# Altium PCB PCB1.1.PcbDoc
Units mm, origin at the board's own origin, x right, y up, seen from the top; angles counter-clockwise.
Board outline 96.29 x 83.36 mm, 2 copper layers (Top Layer, Bottom Layer); 54 components, 58 nets, 305 pads, 6 vias.
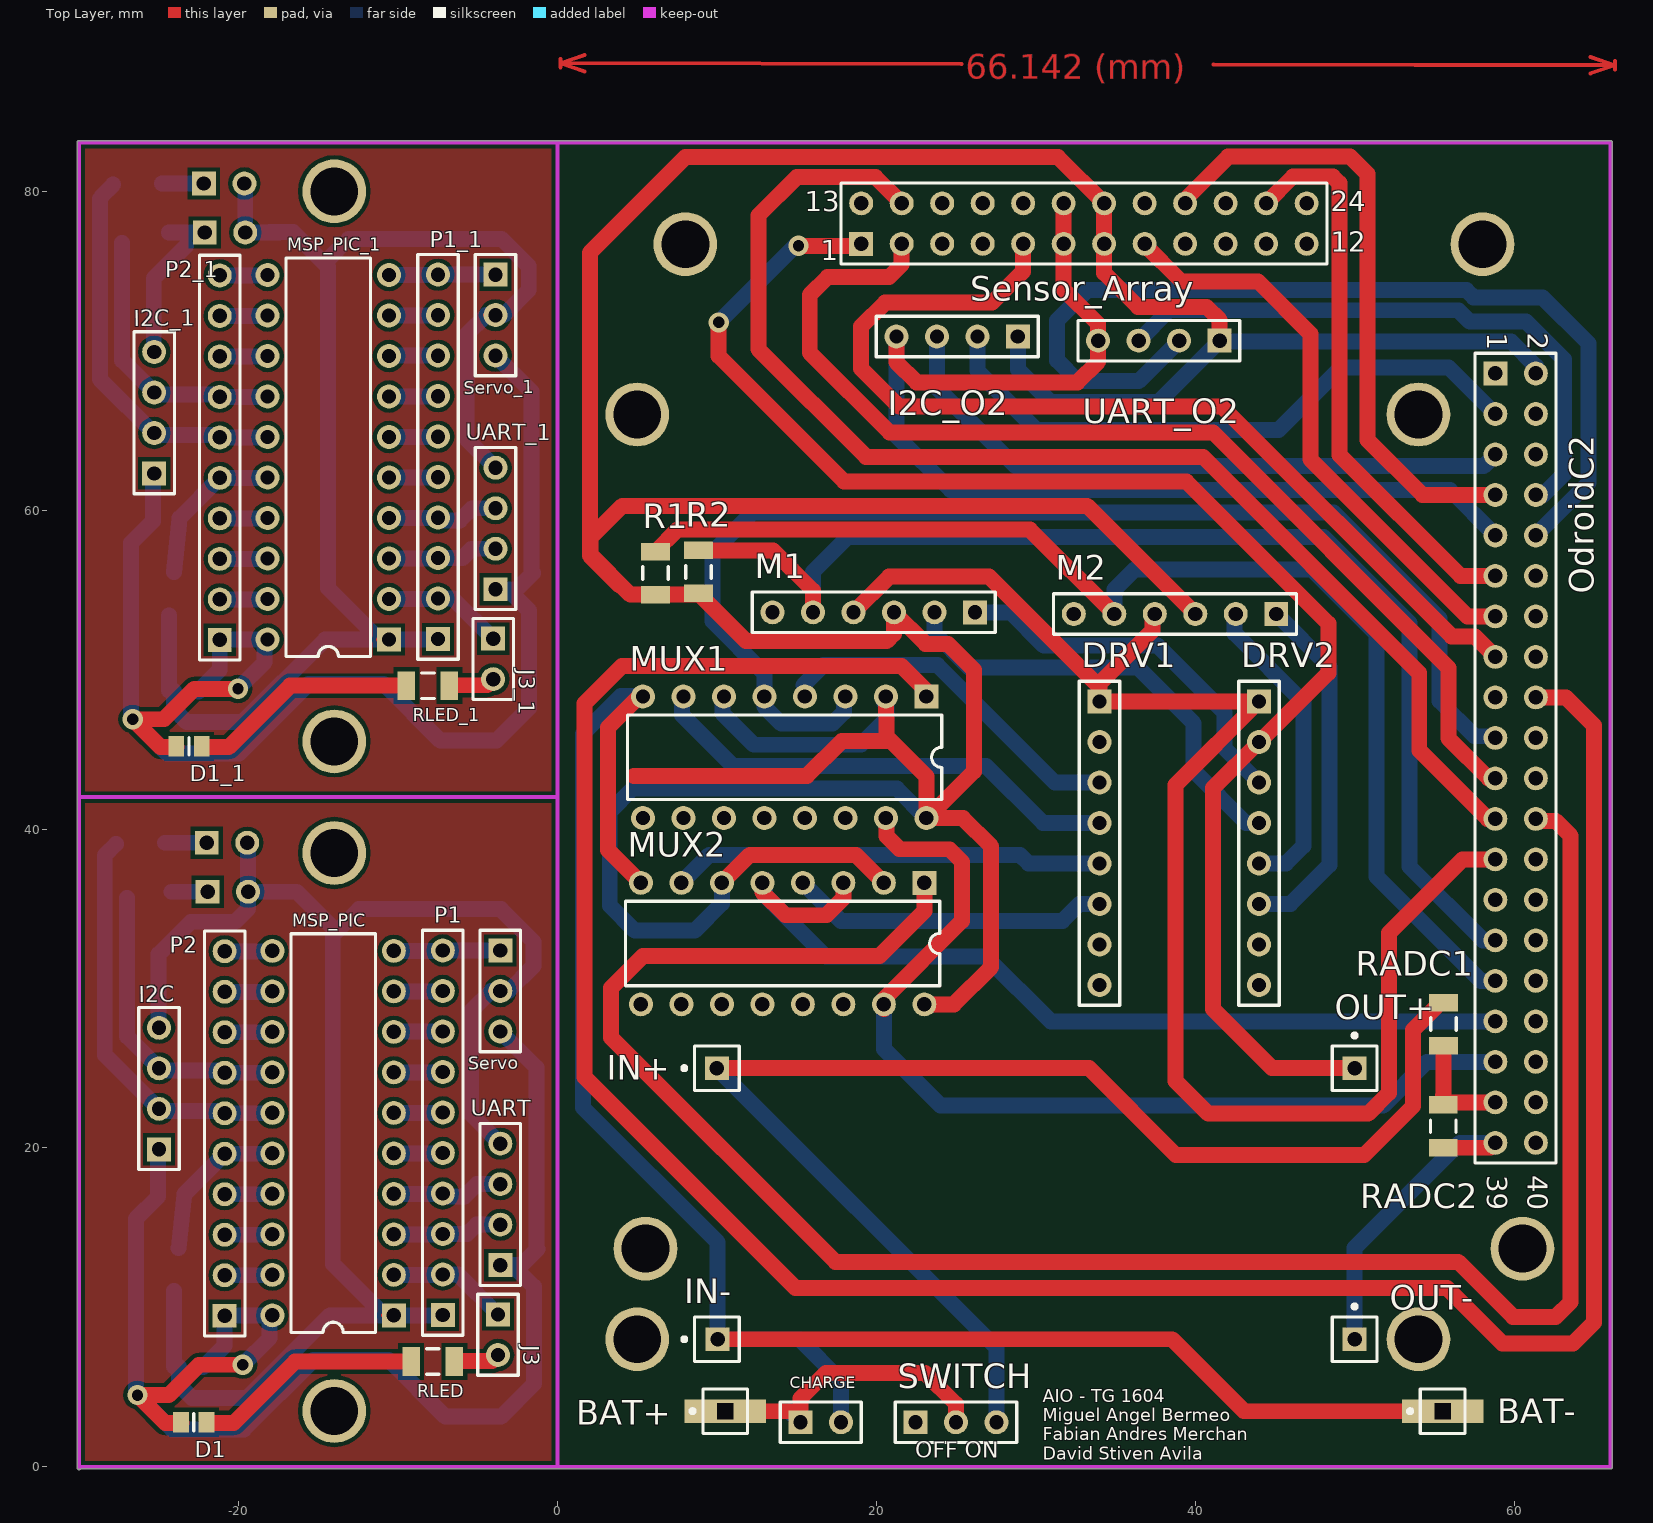
[diagram p0: Top Layer view]
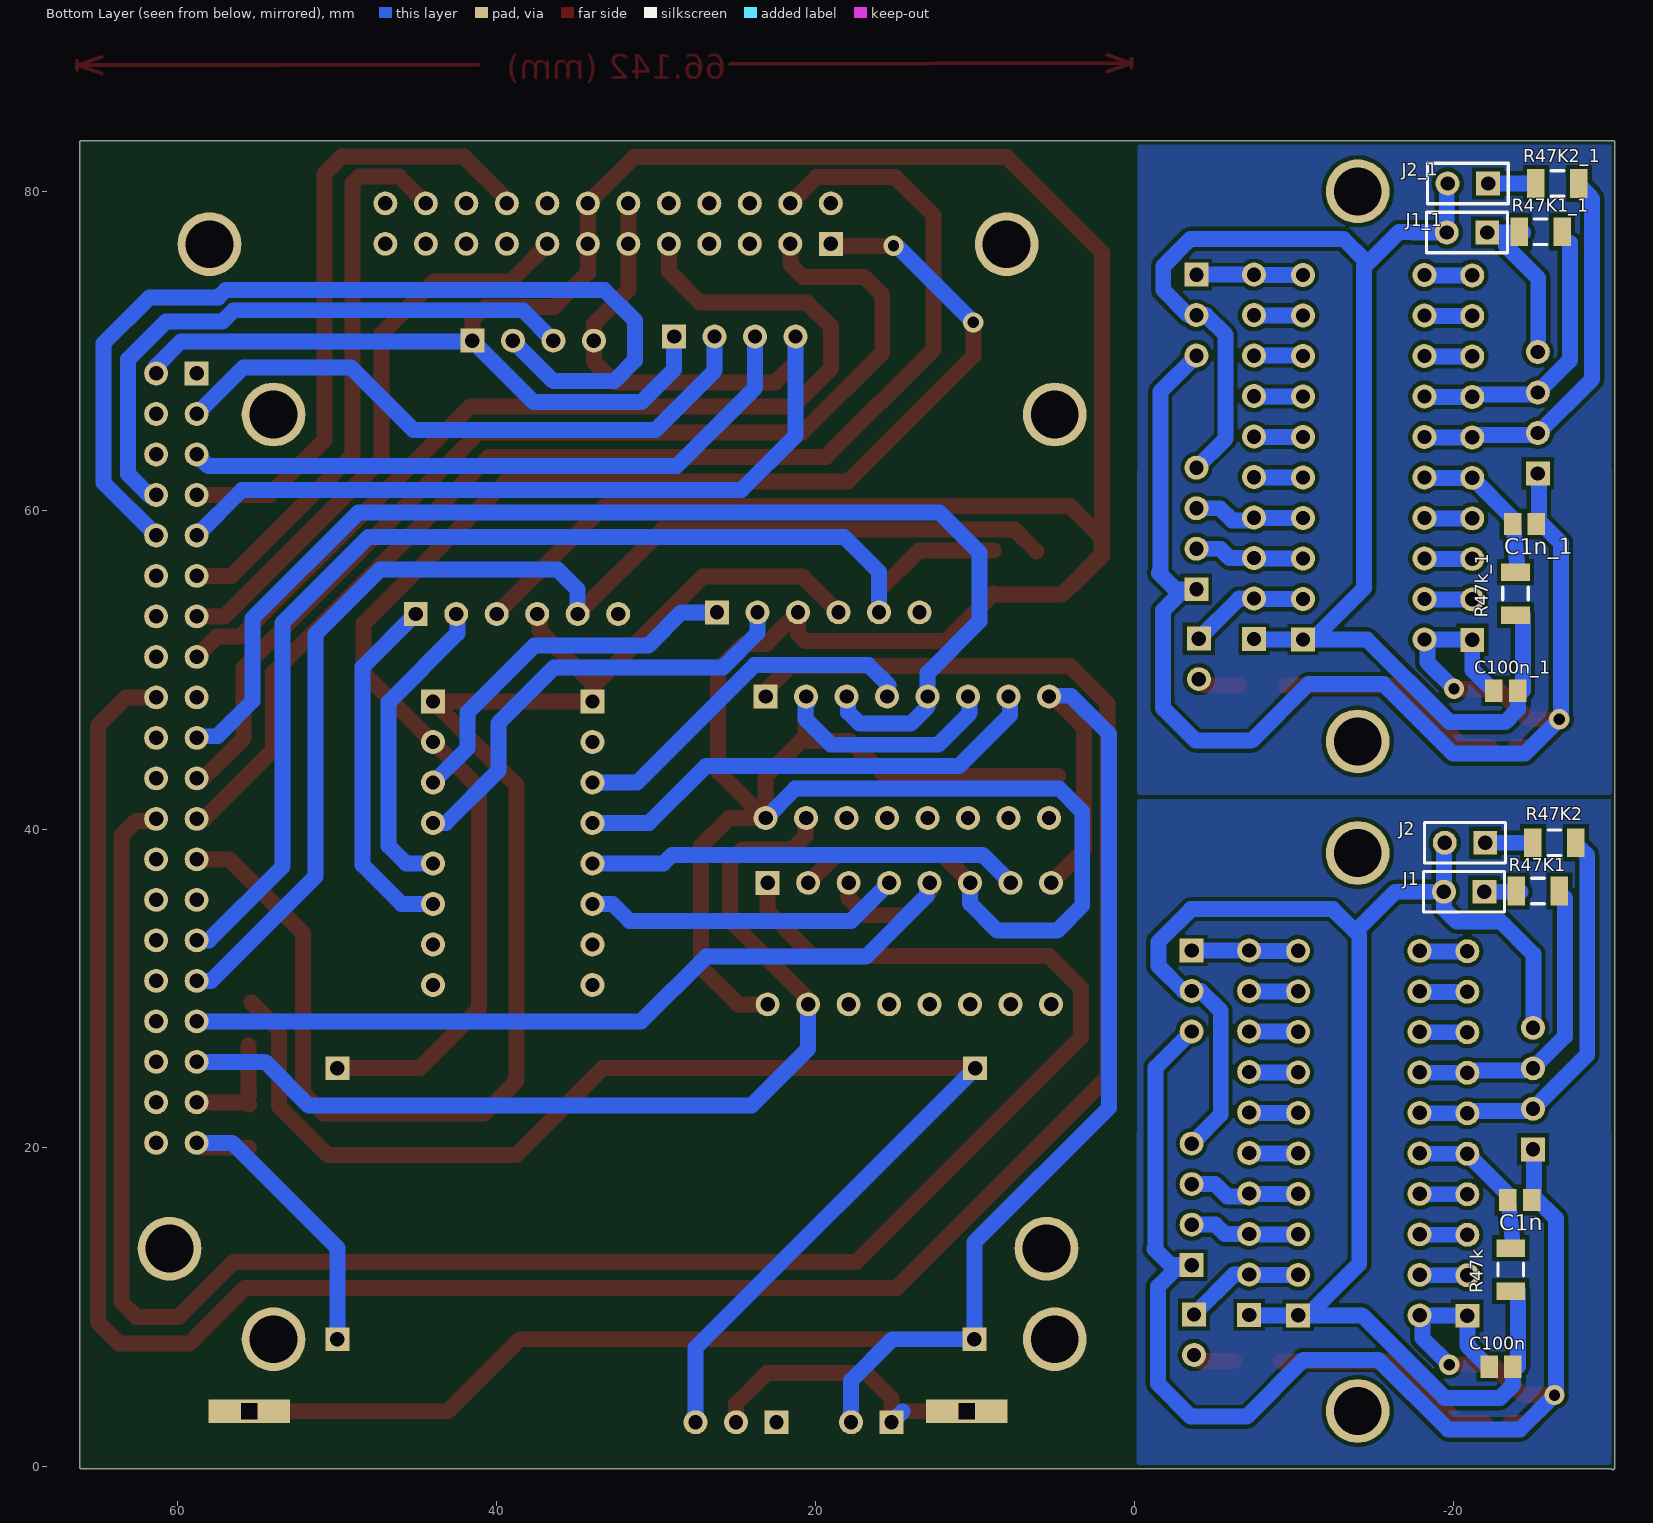
[diagram p1: Bottom Layer view, seen from below]

## Layer stack, top to bottom
Top Solder: solder mask 0.0102, Solder Resist, Dk 3.5
Top Layer: signal copper 0.0356
Dielectric 1: dielectric 0.32, FR-4, Dk 4.8
Bottom Layer: signal copper 1
Bottom Solder: solder mask 0.0102, Solder Resist, Dk 3.5

## Board outline
-30.127,-0.051 -30.127,83.058 cw(c-30,83.058) -30,83.185 66.04,83.185 cw(c66.04,83.058) 66.167,83.058 66.167,0 cw(c66.04,0) 66.04,-0.127 -29.898,-0.127 cw(c-30,-0.051)

## Design rules (kind name [scope] priority, off if disabled: settings)
Clearance [All] p1: gap=0.25
DiffPairsRouting [All] p1: maxlimit=0.254 minlimit=0.254 mostfreqgap=0.254 toplayer_minwidth=0.381 toplayer_maxwidth=2 toplayer_prefwidth=0.381 bottomlayer_minwidth=0.381 bottomlayer_maxwidth=2 bottomlayer_prefwidth=0.381 maxuncoupledlength=12.7
PolygonConnect [All] p1: connectstyle=Relief reliefconductorwidth=0.254 reliefentries=4 polygonreliefangle="90 Angle" airgapwidth=0.254
RoomDefinition Sheet_AIO_Shield [InComponentClass('Sheet_AIO_Shield')] p1: confinementstyle=ConfineIn formatcopy=TRUE lockcomponents=FALSE outline -0.127,-0.457 65.989,-0.457 65.989,83.058 -0.127,83.058
RoomDefinition Sheet_handling_module [InComponentClass('Sheet_handling_module')] p2: confinementstyle=ConfineIn formatcopy=TRUE lockcomponents=FALSE outline -30.124,42.037 0.235,42.037 0.235,0.228 0.081,0.102 -30.124,0.102
RoutingVias [All] p1: holewidth=0.711 width=1.27 viastyle="Through Hole" minholewidth=0.711 minwidth=1.27 maxholewidth=0.711 maxwidth=1.27
SolderMaskExpansion [All] p1: expansion=0.102
Width [All] p1: maxlimit=2 minlimit=0.252 preferedwidth=1 minimp=50.000000 maximp=50.000000 favimp=50.000000
29 further rules are at their usual default settings.

## Classes and differential pairs
component class Sheet_handling_module: C1n C100n D1 I2C J1 J2 J3 Jump1 Jump2 MSP_PIC P1 P2 R47k R47K1 R47K2 RLED Servo UART
component class Sheet_AIO_Shield: BAT+ BAT- CHARGE DRV1 DRV2 I2C_O2 IN+ IN- M1 M2 MUX1 MUX2 OdroidC2 OUT+ OUT- R1 R2 RADC1 RADC2 Sensor_Array SWITCH UART_O2

## Components (designator, comment, footprint, x,y, rotation, side; value= is the part's Value field where it differs from the comment)
BAT+ "Plug" PIN1#1 10.521,3.485 r90 top
BAT- "Plug" PIN1#1 55.519,3.485 r90 top
C1n "Cap Pol3" C0805 -24.155,16.739 r180 bottom
C1n_1 "Cap Pol3" C0805 -24.46,59.131 r180 bottom (schematic designator C1n)
C100n "Cap Pol3" C0805 -22.987,6.274 r0 bottom
C100n_1 "Cap Pol3" C0805 -23.292,48.666 r0 bottom (schematic designator C100n)
CHARGE "Header 2" HDR1X2 15.24,2.794 r0 top
D1 "LED3" 6-0805_L -22.809,2.794 r180 top
D1_1 "LED3" 6-0805_L -23.114,45.187 r180 top (schematic designator D1)
DRV1 "Header 8" HDR1X8 34,48 r270 top
DRV2 "Header 8" HDR1X8 44,48 r270 top
I2C "I2C_MSP430" HDR1X4 -24.994,19.914 r90 top
I2C_1 "I2C_MSP430" HDR1X4 -25.298,62.306 r90 top (schematic designator I2C)
I2C_O2 "I2C_ODROID" HDR1X4 28.88,70.891 r180 top
IN+ "Plug" PIN1#2 10,25 r90 top
IN- "Plug" PIN1#3 10,8 r90 top
J1 "Header 2" HDR1X2 -21.946,36.068 r0 bottom
J1_1 "Header 2" HDR1X2 -22.123,77.419 r0 bottom (schematic designator J1)
J2 "Header 2" HDR1X2 -22,39.141 r0 bottom
J2_1 "Header 2" HDR1X2 -22.177,80.493 r0 bottom (schematic designator J2)
J3 "Header 2" HDR1X2 -3.734,9.55 r270 top
J3_1 "Header 2" HDR1X2 -4.039,51.943 r270 top (schematic designator J3)
M1 "Header 6" HDR1X6 26.187,53.594 r180 top
M2 "Header 6" HDR1X6 45.085,53.492 r180 top
MSP_PIC "Header 10X2A" N020 -14.072,20.93 r90 top
MSP_PIC_1 "Header 10X2A" N020 -14.376,63.322 r90 top (schematic designator MSP_PIC)
MUX1 "Header 8X2A" N016 14.249,44.501 r180 top
MUX2 "Header 8X2A" N016 14.122,32.817 r180 top
OdroidC2 "Header 20X2" HDR2X20 58.826,68.58 r270 top
OUT+ "Plug" PIN1#2 50,25 r0 top
OUT- "Plug" PIN1#2 50,8 r0 top
P1 "Header 10" HDR1X10 -7.188,9.525 r90 top
P1_1 "Header 10" HDR1X10 -7.493,51.918 r90 top (schematic designator P1)
P2 "Header 10" HDR1X10 -20.879,9.474 r90 top
P2_1 "Header 10" HDR1X10 -21.184,51.867 r90 top (schematic designator P2)
R1 "Res3" INDC3216 6.147,56.058 r270 top
R2 "Res3" INDC3216 8.839,56.134 r270 top
R47k "Res3" INDC3216 -23.597,12.37 r270 bottom
R47K1 "Res3" INDC3216 -25.298,36.119 r180 bottom
R47K1_1 "Res3" INDC3216 -25.476,77.47 r180 bottom (schematic designator R47K1)
R47K2 "Res3" INDC3216 -26.34,39.141 r180 bottom
R47K2_1 "Res3" INDC3216 -26.518,80.493 r180 bottom (schematic designator R47K2)
R47k_1 "Res3" INDC3216 -23.901,54.762 r270 bottom (schematic designator R47k)
RADC1 "Res3" INDC3216 55.575,27.762 r90 top
RADC2 "Res3" INDC3216 55.55,21.361 r90 top
RLED "Res3" INDC3216 -7.823,6.604 r0 top
RLED_1 "Res3" INDC3216 -8.128,48.997 r0 top (schematic designator RLED)
Sensor_Array "Header 12X2A" HDR2X12_CEN 19.05,76.708 r0 top
Servo "Header 3" HDR1X3 -3.581,32.385 r270 top
Servo_1 "Header 3" HDR1X3 -3.886,74.778 r270 top (schematic designator Servo)
SWITCH "Header 3" HDR1X3 22.454,2.794 r0 top
UART "UART_MSP430" HDR1X4 -3.581,12.649 r90 top
UART_1 "UART_MSP430" HDR1X4 -3.886,55.042 r90 top (schematic designator UART)
UART_O2 "UART_ODROID" HDR1X4 41.529,70.637 r180 top

## Footprints (in the part's own frame and the unit in brackets; to place one, negate y for a bottom-side part, rotate by r counter-clockwise, add the part's x,y. Pads: shape width x height; smd on the part's side, far side on the other; paste and mask are expansions set on the pad)
6-0805_L [mm] "Chip Resistor, Body 2.0x1.2mm, IPC High Density"
  rect 1x1.3 smd: 1(-0.8,0) 2(0.8,0)
  silkscreen extent 0,-0.55 0,0.55, body extent -1.07,-0.7 1.07,0.7, height 0.7
C0805 [mm] "Chip Capacitor, Body 2.0x1.3mm, IPC High Density"
  rect 1.1x1.4 smd: 1(-0.75,0) 2(0.75,0)
  body extent -1.1,-0.72 1.1,0.72, height 1.4
HDR1X2 [mm] "Connector; Header; 2 Position"
  rect 1.5x1.5 hole 0.9: 1(0,0)
  round 1.5 hole 0.9: 2(2.54,0)
  silkscreen extent -1.27,-1.27 3.81,1.27
HDR1X3 [mm] "Connector; Header; 3 Position"
  rect 1.5x1.5 hole 0.9: 1(0,0)
  round 1.5 hole 0.9: 2(2.54,0) 3(5.08,0)
  silkscreen extent -1.27,-1.27 6.35,1.27
HDR1X4 [mm] "Connector; Header; 4 Position"
  rect 1.5x1.5 hole 0.9: 1(0,0)
  round 1.5 hole 0.9: 2(2.54,0) 3(5.08,0) 4(7.62,0)
  silkscreen extent -1.27,-1.27 8.89,1.27
HDR1X6 [mm] "Connector; Header; 6 Position"
  rect 1.5x1.5 hole 0.9: 1(0,0)
  round 1.5 hole 0.9: 2(2.54,0) 3(5.08,0) 4(7.62,0) 5(10.16,0) 6(12.7,0)
  silkscreen extent -1.27,-1.27 13.97,1.27
HDR1X8 [mm] "Connector; Header; 8 Position"
  rect 1.5x1.5 hole 0.9: 1(0,0)
  round 1.5 hole 0.9: 2(2.54,0) 3(5.08,0) 4(7.62,0) 5(10.16,0) 6(12.7,0) 7(15.24,0) 8(17.78,0)
  silkscreen extent -1.27,-1.27 19.05,1.27
HDR1X10 [mm] "Connector; Header; 10 Position"
  rect 1.5x1.5 hole 0.9: 1(0,0)
  round 1.5 hole 0.9: 2(2.54,0) 3(5.08,0) 4(7.62,0) 5(10.16,0) 6(12.7,0) 7(15.24,0) 8(17.78,0) 9(20.32,0) 10(22.86,0)
  silkscreen extent -1.27,-1.27 24.13,1.27
HDR2X12_CEN [mm] "Connector; Header; 12x2 Position"
  rect 1.5x1.5 hole 0.9: 1(0,0)
  round 1.5 hole 0.9: 2(2.54,0) 3(5.08,0) 4(7.62,0) 5(10.16,0) 6(12.7,0) 7(15.24,0) 8(17.78,0) 9(20.32,0) 10(22.86,0) 11(25.4,0) 12(27.94,0) 13(0,2.54) 14(2.54,2.54) 15(5.08,2.54) 16(7.62,2.54) 17(10.16,2.54) 18(12.7,2.54) 19(15.24,2.54) 20(17.78,2.54) 21(20.32,2.54) 22(22.86,2.54) 23(25.4,2.54) 24(27.94,2.54)
  silkscreen extent -1.27,-1.27 29.21,3.81
HDR2X20 [mm] "Connector; Header; 20x2 Position"
  rect 1.5x1.5 hole 0.9: 1(0,0)
  round 1.5 hole 0.9: 2(0,2.54) 3(2.54,0) 4(2.54,2.54) 5(5.08,0) 6(5.08,2.54) 7(7.62,0) 8(7.62,2.54) 9(10.16,0) 10(10.16,2.54) 11(12.7,0) 12(12.7,2.54) 13(15.24,0) 14(15.24,2.54) 15(17.78,0) 16(17.78,2.54) 17(20.32,0) 18(20.32,2.54) 19(22.86,0) 20(22.86,2.54) 21(25.4,0) 22(25.4,2.54) 23(27.94,0) 24(27.94,2.54) 25(30.48,0) 26(30.48,2.54) 27(33.02,0) 28(33.02,2.54) 29(35.56,0) 30(35.56,2.54) 31(38.1,0) 32(38.1,2.54) 33(40.64,0) 34(40.64,2.54) 35(43.18,0) 36(43.18,2.54) 37(45.72,0) 38(45.72,2.54) 39(48.26,0) 40(48.26,2.54)
  silkscreen extent -1.27,-1.27 49.53,3.81
INDC3216 [mm] "Chip Inductor, Body 3.2x1.6mm, IPC High Density"
  rect 1.1x1.8 smd: 1(-1.35,0) 2(1.35,0)
  silkscreen extent -0.4,-0.8 0.4,0.8, body extent -1.7,-0.9 1.7,0.9, height 0.55
N016 [mm] "DIP; 16 Leads; Row Spacing 7.62 mm; Pitch 2.54 mm"
  rect 1.5x1.5 hole 0.9: 1(-8.89,-3.81)
  round 1.5 hole 0.9: 2(-6.35,-3.81) 3(-3.81,-3.81) 4(-1.27,-3.81) 5(1.27,-3.81) 6(3.81,-3.81) 7(6.35,-3.81) 8(8.89,-3.81) 9(8.89,3.81) 10(6.35,3.81) 11(3.81,3.81) 12(1.27,3.81) 13(-1.27,3.81) 14(-3.81,3.81) 15(-6.35,3.81) 16(-8.89,3.81)
  silkscreen extent -9.85,-2.65 9.85,2.65
N020 [mm] "DIP; 20 Leads; Row Spacing 7.62 mm; Pitch 2.54 mm"
  rect 1.5x1.5 hole 0.9: 1(-11.43,-3.81)
  round 1.5 hole 0.9: 2(-8.89,-3.81) 3(-6.35,-3.81) 4(-3.81,-3.81) 5(-1.27,-3.81) 6(1.27,-3.81) 7(3.81,-3.81) 8(6.35,-3.81) 9(8.89,-3.81) 10(11.43,-3.81) 11(11.43,3.81) 12(8.89,3.81) 13(6.35,3.81) 14(3.81,3.81) 15(1.27,3.81) 16(-1.27,3.81) 17(-3.81,3.81) 18(-6.35,3.81) 19(-8.89,3.81) 20(-11.43,3.81)
  silkscreen extent -12.5,-2.65 12.5,2.65
PIN1#1 [mm] "Connector; Plug"
  rect 1.5x5.1 hole 1 square: 1(0,0)
  silkscreen extent -1.4,-1.4 1.4,2.17
PIN1#2 [mm] "Connector; Plug"
  rect 1.5x1.5 hole 0.9: 1(0,0)
  silkscreen extent -1.4,-1.4 1.4,2.17
PIN1#3 [mm] "Connector; Plug"
  rect 1.5x1.5 hole 0.9: 1(0,-0.046)
  silkscreen extent -1.4,-1.4 1.4,2.17

## Part data
C1n C1n_1 C100n C100n_1: "Polarized Capacitor (Surface Mount)"
CHARGE J1 J1_1 J2 J2_1 J3 J3_1: "Header, 2-Pin"
D1 D1_1: "Typical BLUE SiC LED"
DRV1 DRV2: "Header, 8-Pin"
I2C I2C_1 I2C_O2 UART UART_1 UART_O2: library part "Header 4", "Header, 4-Pin"
M1 M2: "Header, 6-Pin"
MSP_PIC MSP_PIC_1: "Header, 10-Pin, Dual row"
MUX1 MUX2: "Header, 8-Pin, Dual row"
OdroidC2: "Header, 20-Pin, Dual row"
P1 P1_1 P2 P2_1: "Header, 10-Pin"
R1 R2 R47k R47K1 R47K1_1 R47K2 R47K2_1 R47k_1 RADC1 RADC2 RLED RLED_1: "Resistor"
Sensor_Array: "Header, 12-Pin, Dual row"
Servo Servo_1 SWITCH: "Header, 3-Pin"

## Free pads (board coordinates)
  round 4 hole 3: 2(-14,3.5) 2(-14,38.5) 2(-14,45.5) 2(-14,80) 2(5,8) 2(5,66) 2(5.519,13.683) 2(8.019,76.685) 2(54,8) 2(54,66) 2(58.021,76.685) 2(60.521,13.683)

## Via types
v1: diameter 1.27, hole 0.711, Top Layer to Bottom Layer, 6 vias

## Nets (pads, with @x,y where several pads share a name; then routed paths per layer and width w, separated by ;. In a path a pad name is that pad's centre, name@x,y a point inside that pad or via, vN(x,y) a via of type N, cw(c..) or ccw(c..) an arc to the next point about the centre after c; other vN are vias at no path point)
5V: I2C_O2.1 M1.3 M2.3 MUX1.2 MUX1.6 MUX1.16 MUX2.2 MUX2.6 MUX2.16 OdroidC2.2 R1.2 R2.2 Sensor_Array.7 Sensor_Array.19 UART_O2.1 | length 298
  Top Layer w1: 3.912,55.27 2.032,57.15 2.032,76.149 8.026,82.144 31.394,82.144 Sensor_Array.19 Sensor_Array.7 34.29,74.879 36.424,72.746 40.716,72.746 41.529,71.933 UART_O2.1 ; 4.801,43.332 15.646,43.332 17.831,45.517 20.599,45.517 20.599,45.847 20.624,45.822 ; MUX2.6 12.065,38.379 18.72,38.379 MUX2.2 ; MUX1.2 20.624,45.822 ; 20.625,45.745 20.624,45.822 ; MUX2.16 24.867,29.007 27.203,31.344 27.203,38.913 25.425,40.691 MUX1.16 MUX1.16@23.139,40.881 ; M2.3 33.223,60.274 4.064,60.274 2.083,58.293 2.083,57.201 4.576,54.708 R1.2 8.763,54.708 R2.2 11.833,51.791 20.65,51.791 21.107,52.248 M1.3 23.089,51.613 24.486,51.613 26.111,49.987 26.111,43.612 23.381,40.881 MUX1.16@23.139,40.881 ; 20.624,45.822 23.139,43.307 MUX1.16@23.139,40.881
  Bottom Layer w1: MUX2.6 10.312,35.331 8.611,33.63 4.851,33.63 3.277,35.204 3.277,41.097 4.724,42.545 21.285,42.545 MUX1.16 ; MUX1.6@10.338,48.311 10.338,47.269 12.319,45.288 19.025,45.288 20.65,46.914 20.65,47.777 MUX1.2@20.472,47.955 ; I2C_O2.1 28.88,68.834 30.932,66.782 37.674,66.782 UART_O2.1 41.585,70.581 59.822,70.581 61.366,69.037 OdroidC2.2
GND: I2C_O2.4 OdroidC2.9 Sensor_Array.6 Sensor_Array.18 UART_O2.4 | length 72.5
  Top Layer w1: I2C_O2.4 21.26,69.291 22.53,68.021 32.614,68.021 33.909,69.317 UART_O2.4 33.909,71.679 31.75,73.838 Sensor_Array.6 Sensor_Array.18
  Bottom Layer w1: I2C_O2.4 21.26,64.668 24.663,61.265 55.982,61.265 OdroidC2.9
NetBAT+_1: BAT+.1 CHARGE.1 SWITCH.2 | length 18.9
  Top Layer w1: BAT+.1 CHARGE.1@14.549,3.485 ; CHARGE.1 15.24,4.293 16.84,5.893 23.038,5.893 24.994,3.937 SWITCH.2
  Bottom Layer w1: CHARGE.1@14.549,3.485 CHARGE.1
NetBAT-_1: BAT-.1 CHARGE.2 IN-.1 MUX1.8 MUX2.8 | length 118.6
  Top Layer w1: MUX2.8 3.175,38.684 3.175,46.38 5.105,48.311 MUX1.8 ; IN-.1 38.558,8 43.073,3.485 BAT-.1
  Bottom Layer w1: MUX1.8@5.359,48.362 3.988,48.362 1.6,45.974 1.6,22.53 10.046,14.084 IN-.1 15.19,8 17.78,5.41 CHARGE.2
NetC1n_1: C1n.1 MSP_PIC.16 P2.5 R47k.1 | length 9.7
  Top Layer w0.4: MSP_PIC.16@-17.907,19.634 MSP_PIC.16
  Bottom Layer w0.4: R47k.1@-23.761,13.682 R47k.1@-23.761,13.72
  Bottom Layer w1: R47k.1@-23.761,13.72 -23.759,13.737 -23.444,16.743 -23.405,17.108 P2.5 ; P2.5@-20.523,19.634 MSP_PIC.16@-17.907,19.634
NetC1n_2: C1n.2 C100n.2 D1.2 I2C.1 MSP_PIC.20 P2.1 Servo.3 UART.1 | length 92.5
  Top Layer w1: D1.2@-23.584,2.743 -24.587,2.743 v1(-26.34,4.496) -24.384,4.496 -22.479,6.401 v1(-19.736,6.401)
  Bottom Layer w0.4: MSP_PIC.20 MSP_PIC.20@-17.729,9.347
  Bottom Layer w1: v1@-26.441,4.521 -26.441,15.558 -25.059,16.941 -25.059,19.849 I2C.1 ; v1(-26.34,4.496) -24.181,2.337 -19.67,2.337 -15.301,6.706 -10.592,6.706 -7.036,3.15 -3.531,3.15 -1.473,5.207 -1.473,11.303 -2.819,12.649 ; C100n.2@-22.225,6.248 -20.879,7.595 P2.1 ; P2.1@-20.498,9.5 MSP_PIC.20 ; v1(-19.736,6.401) -18.059,8.077 -18.059,9.017 MSP_PIC.20@-17.729,9.347 ; UART.1 -2.819,12.649 ; Servo.3 -1.321,25.044 -1.321,13.665 ; -1.245,13.665 -2.261,12.649 -2.819,12.649
NetC100n_1: C100n.1 I2C.4 J1.2 J2.2 MSP_PIC.1 P1.1 R47k.2 Servo.2 UART.4 | length 102
  Top Layer w0.4: MSP_PIC.1@-10.871,9.5 MSP_PIC.1 ; P1.1@-7.214,9.5 P1.1 ; Servo.2@-4.166,29.845 Servo.2 Servo.2@-3.073,29.845
  Bottom Layer w1: I2C.4@-25.019,27.305 -25.019,32.156 -22.987,34.188 -20.218,34.188 -19.406,35.001 J1.2 J2.2@-19.406,39.319 ; C100n.1@-24.054,6.301 R47k.2@-24.054,11.02 ; C100n.1 -23.737,5.119 -22.936,4.318 -19.456,4.318 -14.275,9.5 MSP_PIC.1@-10.871,9.5 ; J1.2@-18.669,36.068 -16.358,36.068 -14.097,33.807 ; P1.1@-7.214,9.5 MSP_PIC.1 MSP_PIC.1@-10.871,9.5 ; Servo.2@-4.166,29.845 -5.41,28.6 -5.41,22.098 UART.4 ; Servo.2@-3.073,29.845 -1.499,31.42 -1.499,32.918 -3.556,34.976 -12.446,34.976 -14.097,33.325 -14.097,12.725 MSP_PIC.1@-10.871,9.5
NetD1_1: D1.1 RLED.1 | length 14.4
  Top Layer w1: D1.1@-21.984,2.743 -20.32,2.743 -16.459,6.604 RLED.1
NetDRV1_1: DRV1.1 DRV2.1 M1.4 M2.4 OdroidC2.25 | length 95.4
  Top Layer w1: M1.4 20.803,55.829 27.076,55.829 33.767,49.138 34,49.138 ; M2.4@37.313,53.492 37.313,52.451 34,49.138 ; OdroidC2.25 56.769,38.1 52.146,33.477 52.146,23.444 50.851,22.149 40.818,22.149 38.76,24.206 38.76,42.76 DRV2.1 DRV1.1 34,49.138
NetDRV1_3: DRV1.3 MUX1.4 | length 22.2
  Bottom Layer w1: MUX1.4@15.418,49.022 16.688,50.292 23.825,50.292 31.197,42.92 DRV1.3
NetDRV1_4: DRV1.4 MUX1.7 | length 30.2
  Bottom Layer w1: MUX1.7@7.798,48.311 7.798,47.168 10.998,43.967 26.873,43.967 30.461,40.38 DRV1.4
NetDRV1_5: DRV1.5 MUX2.7 | length 27.2
  Bottom Layer w1: MUX2.7 9.525,38.379 29.007,38.379 29.546,37.84 DRV1.5
NetDRV1_6: DRV1.6 MUX2.4 | length 20
  Bottom Layer w1: MUX2.4 17.78,34.239 31.674,34.239 32.735,35.3 DRV1.6
NetDRV2_2: DRV2.2 OUT+.1 Sensor_Array.1 | length 95.9
  Top Layer w1: v1(10.109,71.78) 10.109,69.672 17.983,61.798 39.446,61.798 48.362,52.883 48.362,49.801 44.021,45.46 DRV2.2 41.123,42.583 41.123,28.702 44.825,25 OUT+.1 ; v1(15.113,76.581) 18.923,76.581 Sensor_Array.1
  Bottom Layer w1: v1(10.109,71.78) 14.91,76.581 v1(15.113,76.581)
NetDRV2_3: DRV2.3 M1.1 | length 23.5
  Bottom Layer w1: M1.1 28.423,53.594 30.505,51.511 37.643,51.511 41.834,47.32 41.834,45.086 DRV2.3
NetDRV2_4: DRV2.4 M1.2 | length 28.3
  Bottom Layer w1: M1.2 23.647,52.299 25.806,50.14 36.398,50.14 39.903,46.634 39.903,43.663 43.186,40.38 DRV2.4
NetDRV2_5: DRV2.5 M2.2 | length 19.5
  Bottom Layer w1: M2.2@42.469,53.416 42.469,52.273 46.787,47.955 46.787,38.938 45.689,37.84 DRV2.5
NetDRV2_6: DRV2.6 M2.1 | length 22.6
  Bottom Layer w1: DRV2.6 45.968,35.3 48.412,37.744 48.412,50.165 M2.1
NetI2C_2: I2C.2 MSP_PIC.15 P2.6 R47K2.2 | length 24.9
  Top Layer w0.4: P2.6@-21.031,22.327 P2.6 ; MSP_PIC.15@-17.907,22.174 MSP_PIC.15
  Bottom Layer w1: R47K2.2@-27.69,39.065 -28.397,38.358 -28.397,25.832 I2C.2@-24.892,22.327 ; I2C.2@-24.536,22.327 P2.6@-21.031,22.327 ; P2.6@-20.523,22.174 MSP_PIC.15@-17.907,22.174
NetI2C_3: I2C.3 MSP_PIC.14 P2.7 R47K1.2 | length 17.9
  Top Layer w0.4: P2.7@-21.031,24.867 P2.7 ; MSP_PIC.14@-17.907,24.714 MSP_PIC.14
  Bottom Layer w1: R47K1.2@-27,35.665 -27,27 I2C.3 ; I2C.3@-24.536,24.867 P2.7@-21.031,24.867 ; P2.7@-20.523,24.714 MSP_PIC.14@-17.907,24.714
NetI2C_O2_2: I2C_O2.2 OdroidC2.3 | length 39
  Bottom Layer w1: I2C_O2.2 26.34,68.758 30.074,65.024 45.212,65.024 49.149,68.961 55.885,68.961 58.806,66.04 OdroidC2.3
NetI2C_O2_3: I2C_O2.3 OdroidC2.5 | length 40.6
  Bottom Layer w1: I2C_O2.3 23.8,67.691 28.727,62.763 58.09,62.763 OdroidC2.5
NetIN+_1: IN+.1 RADC1.2 SWITCH.3 | length 83.9
  Top Layer w1: IN+.1 33.344,25 38.786,19.558 50.597,19.558 53.67,22.631 53.67,27.41 RADC1.2@55.372,29.112
  Bottom Layer w1: IN+.1 27.534,7.466 SWITCH.3
NetJ1_1: J1.1 R47K1.1 | length 2.3
  Bottom Layer w1: R47K1.1@-24.206,36.068 J1.1
NetJ2_1: J2.1 R47K2.1 | length 2.6
  Bottom Layer w1: R47K2.1@-24.634,39.141 J2.1
NetJ3_1: J3.1 MSP_PIC.2 P1.2 | length 7.6
  Top Layer w0.4: P1.2@-7.214,12.04 P1.2
  Bottom Layer w1: MSP_PIC.2 P1.2@-7.214,12.04 ; P1.2 -6.248,12.065 J3.1
NetJ3_2: J3.2 RLED.2 | length 2.7
  Top Layer w1: RLED.2@-6.245,6.629 -4.115,6.629 J3.2
NetM1_5: M1.5 OdroidC2.29 R2.1 | length 75.3
  Top Layer w1: R2.1 13.509,57.484 16.027,54.966 M1.5
  Bottom Layer w1: M1.5 16.027,56.134 18.212,58.318 48.057,58.318 53.442,52.934 53.442,37.643 58.064,33.02 OdroidC2.29
NetM2_5: M2.5 OdroidC2.31 R1.1 | length 77.1
  Top Layer w1: R1.1 7.523,58.784 29.633,58.784 M2.5
  Bottom Layer w1: M2.5 34.925,55.016 36.195,56.286 47.32,56.286 51.359,52.248 51.359,37.033 57.912,30.48 OdroidC2.31
NetMSP_PIC_3: MSP_PIC.3 P1.3 UART.2 | length 6.9
  Top Layer w0.4: P1.3@-7.214,14.58 P1.3
  Bottom Layer w1: MSP_PIC.3 P1.3@-7.214,14.58 ; P1.3 -5.664,14.605 -5.08,15.189 UART.2
NetMSP_PIC_4: MSP_PIC.4 P1.4 UART.3 | length 7.1
  Top Layer w0.4: P1.4@-7.214,17.12 P1.4 P1.4@-7.01,16.967
  Bottom Layer w1: MSP_PIC.4 P1.4@-7.214,17.12 ; P1.4@-7.01,16.967 -5.817,16.967 -5.055,17.729 UART.3
NetMSP_PIC_5: MSP_PIC.5 P1.5 | length 3.1
  Top Layer w0.4: P1.5@-7.214,19.66 P1.5
  Bottom Layer w1: MSP_PIC.5 P1.5@-7.214,19.66
NetMSP_PIC_6: MSP_PIC.6 P1.6 | length 3.1
  Top Layer w0.4: P1.6@-7.214,22.2 P1.6
  Bottom Layer w1: MSP_PIC.6 P1.6@-7.214,22.2
NetMSP_PIC_7: MSP_PIC.7 P1.7 | length 3.1
  Top Layer w0.4: P1.7@-7.214,24.74 P1.7
  Bottom Layer w1: MSP_PIC.7 P1.7@-7.214,24.74
NetMSP_PIC_8: MSP_PIC.8 P1.8 | length 3.1
  Top Layer w0.4: MSP_PIC.8 MSP_PIC.8@-10.236,27.305
  Bottom Layer w1: MSP_PIC.8@-10.236,27.305 P1.8
NetMSP_PIC_9: MSP_PIC.9 P1.9 | length 3.1
  Top Layer w0.4: P1.9@-7.214,29.82 P1.9
  Bottom Layer w1: MSP_PIC.9 P1.9@-7.214,29.82
NetMSP_PIC_10: MSP_PIC.10 P1.10 Servo.1 | length 6.7
  Top Layer w0.4: P1.10@-7.214,32.36 P1.10
  Bottom Layer w1: MSP_PIC.10 P1.10@-7.214,32.36 ; P1.10 Servo.1
NetMSP_PIC_11: MSP_PIC.11 P2.10 | length 2.7
  Top Layer w0.4: MSP_PIC.11@-17.907,32.334 MSP_PIC.11
  Bottom Layer w1: P2.10@-20.523,32.334 MSP_PIC.11@-17.907,32.334
NetMSP_PIC_12: MSP_PIC.12 P2.9 | length 2.7
  Top Layer w0.4: MSP_PIC.12@-17.907,29.794 MSP_PIC.12
  Bottom Layer w1: P2.9@-20.523,29.794 MSP_PIC.12@-17.907,29.794
NetMSP_PIC_13: MSP_PIC.13 P2.8 | length 2.7
  Top Layer w0.4: MSP_PIC.13@-17.907,27.254 MSP_PIC.13
  Bottom Layer w1: P2.8@-20.523,27.254 MSP_PIC.13@-17.907,27.254
NetMSP_PIC_17: MSP_PIC.17 P2.4 | length 2.7
  Top Layer w0.4: MSP_PIC.17@-17.907,17.094 MSP_PIC.17
  Bottom Layer w1: P2.4@-20.523,17.094 MSP_PIC.17@-17.907,17.094
NetMSP_PIC_18: MSP_PIC.18 P2.3 | length 2.7
  Top Layer w0.4: MSP_PIC.18@-17.907,14.554 MSP_PIC.18
  Bottom Layer w1: P2.3@-20.523,14.554 MSP_PIC.18@-17.907,14.554
NetMSP_PIC_19: MSP_PIC.19 P2.2 | length 2.7
  Top Layer w0.4: MSP_PIC.19@-17.907,12.014 MSP_PIC.19
  Bottom Layer w1: P2.2@-20.523,12.014 MSP_PIC.19@-17.907,12.014
NetMUX1_1: MUX1.1 OdroidC2.18 | length 158.9
  Top Layer w1: MUX1.1@23.038,48.768 21.59,50.216 4.039,50.216 1.702,47.879 1.702,24.435 14.935,11.201 55.804,11.201 59.258,7.747 63.703,7.747 65.004,9.048 65.004,46.507 63.251,48.26 OdroidC2.18
NetMUX1_3: MUX1.3 MUX1.5 OdroidC2.19 | length 76.9
  Bottom Layer w1: MUX1.3@17.958,48.311 17.958,47.32 17.247,46.609 14.046,46.609 12.979,47.676 MUX1.5 12.979,49.784 9.728,53.035 9.728,57.353 12.243,59.868 48.666,59.868 55.321,53.213 55.321,48.031 57.531,45.822 OdroidC2.19@59.004,45.822
NetMUX1_15: MUX1.15 MUX2.15 OdroidC2.35 | length 61.3
  Top Layer w1: MUX2.15@20.472,28.727 MUX2.15 20.472,29.337 25.375,34.239 25.375,37.948 24.587,38.735 21.463,38.735 20.65,39.548 20.65,40.538 MUX1.15@20.498,40.691
  Bottom Layer w1: MUX2.15@20.472,28.727 20.472,26.213 24.028,22.657 51.791,22.657 54.534,25.4 OdroidC2.35
NetMUX2_1: MUX2.1 OdroidC2.24 | length 125.9
  Top Layer w1: MUX2.1 23.012,34.849 20.193,32.029 5.359,32.029 3.353,30.023 3.353,26.939 17.44,12.852 56.49,12.852 59.944,9.398 62.611,9.398 63.551,10.338 63.551,39.573 62.611,40.513 OdroidC2.24@61.646,40.513
NetMUX2_3: MUX2.3 MUX2.5 OdroidC2.33 | length 57.7
  Top Layer w1: MUX2.5 12.852,36.043 14.3,34.595 16.866,34.595 17.932,35.662 MUX2.3
  Bottom Layer w1: MUX2.5@13.005,36.805 13.005,35.839 16.84,32.004 26.873,32.004 30.937,27.94 OdroidC2.33
NetOdroidC2_7: OdroidC2.7 Sensor_Array.21 | length 39.4
  Top Layer w1: Sensor_Array.21 39.37,79.489 42.062,82.181 49.721,82.181 50.8,81.102 50.8,64.414 54.254,60.96 OdroidC2.7
NetOdroidC2_8: OdroidC2.8 UART_O2.3 | length 38.2
  Bottom Layer w1: UART_O2.3 38.354,72.542 56.507,72.542 57.218,71.831 60.754,71.831 63.119,69.467 63.119,62.255 61.824,60.96 OdroidC2.8
NetOdroidC2_10: OdroidC2.10 UART_O2.2 | length 60.7
  Bottom Layer w1: UART_O2.2 36.449,68.097 32.639,68.097 31.344,69.393 31.344,71.907 33.249,73.812 57.005,73.812 57.462,73.355 61.773,73.355 64.668,70.46 64.668,61.722 OdroidC2.10
NetOdroidC2_11: OdroidC2.11 Sensor_Array.23 | length 35.4
  Top Layer w1: Sensor_Array.23 46.133,80.931 48.634,80.931 49.047,80.518 49.047,63.475 56.642,55.88 OdroidC2.11
NetOdroidC2_13: OdroidC2.13 Sensor_Array.8 | length 36.4
  Top Layer w1: Sensor_Array.8 36.779,76.708 39.141,74.346 43.942,74.346 47.219,71.069 47.219,63.195 57.074,53.34 OdroidC2.13
NetOdroidC2_15: OdroidC2.15 Sensor_Array.5 | length 63.2
  Top Layer w1: Sensor_Array.5 29.21,74.981 27.254,73.025 20.549,73.025 19.05,71.526 19.05,68.885 21.438,66.497 41.681,66.497 56.089,52.09 57.536,52.09 OdroidC2.15
NetOdroidC2_21: OdroidC2.21 Sensor_Array.2 | length 68.1
  Top Layer w1: Sensor_Array.2 21.59,75.413 20.803,74.625 16.942,74.625 15.824,73.508 15.824,69.875 20.828,64.872 41.123,64.872 55.88,50.114 55.88,45.695 58.395,43.18 OdroidC2.21
NetOdroidC2_23: OdroidC2.23 Sensor_Array.14 | length 80.3
  Top Layer w1: Sensor_Array.14 19.944,80.894 15.006,80.894 12.598,78.486 12.598,70.104 19.355,63.348 40.488,63.348 54.051,49.784 54.051,44.933 58.344,40.64 OdroidC2.23
NetOdroidC2_37: OdroidC2.37 RADC1.1 RADC2.2 | length 6.5
  Top Layer w1: RADC2.2 55.698,22.86 OdroidC2.37 ; 55.55,23.296 55.575,23.321 RADC1.1
NetOdroidC2_39: OdroidC2.39 OUT-.1 RADC2.1 | length 20.9
  Top Layer w1: RADC2.1 58.518,20.011 OdroidC2.39
  Bottom Layer w1: OUT-.1 50,13.729 56.591,20.32 OdroidC2.39 OdroidC2.39@58.699,20.193
pads on no net: C1n_1.1 C1n_1.2 C100n_1.1 C100n_1.2 D1_1.1 D1_1.2 DRV1.2 DRV1.7 DRV1.8 DRV2.7 DRV2.8 I2C_1.1 I2C_1.2 I2C_1.3 I2C_1.4 J1_1.1 J1_1.2 J2_1.1 J2_1.2 J3_1.1 J3_1.2 M1.6 M2.6 MSP_PIC_1.1 MSP_PIC_1.2 MSP_PIC_1.3 MSP_PIC_1.4 MSP_PIC_1.5 MSP_PIC_1.6 MSP_PIC_1.7 MSP_PIC_1.8 MSP_PIC_1.9 MSP_PIC_1.10 MSP_PIC_1.11 MSP_PIC_1.12 MSP_PIC_1.13 MSP_PIC_1.14 MSP_PIC_1.15 MSP_PIC_1.16 MSP_PIC_1.17 MSP_PIC_1.18 MSP_PIC_1.19 MSP_PIC_1.20 MUX1.9 MUX1.10 MUX1.11 MUX1.12 MUX1.13 MUX1.14 MUX2.9 MUX2.10 MUX2.11 MUX2.12 MUX2.13 MUX2.14 OdroidC2.1 OdroidC2.4 OdroidC2.6 OdroidC2.12 OdroidC2.14 OdroidC2.16 OdroidC2.17 OdroidC2.20 OdroidC2.22 OdroidC2.26 OdroidC2.27 OdroidC2.28 OdroidC2.30 OdroidC2.32 OdroidC2.34 OdroidC2.36 OdroidC2.38 OdroidC2.40 P1_1.1 P1_1.2 P1_1.3 P1_1.4 P1_1.5 P1_1.6 P1_1.7 P1_1.8 P1_1.9 P1_1.10 P2_1.1 P2_1.2 P2_1.3 P2_1.4 P2_1.5 P2_1.6 P2_1.7 P2_1.8 P2_1.9 P2_1.10 R47K1_1.1 R47K1_1.2 R47K2_1.1 R47K2_1.2 R47k_1.1 R47k_1.2 RLED_1.1 RLED_1.2 Sensor_Array.3 Sensor_Array.4 Sensor_Array.9 Sensor_Array.10 Sensor_Array.11 Sensor_Array.12 Sensor_Array.13 Sensor_Array.15 Sensor_Array.16 Sensor_Array.17 Sensor_Array.20 Sensor_Array.22 Sensor_Array.24 Servo_1.1 Servo_1.2 Servo_1.3 SWITCH.1 UART_1.1 UART_1.2 UART_1.3 UART_1.4
copper on no net: | length 378.4
  Top Layer w0.254: 0.177,87.782 0.178,88.29 ; 1.701,87.525 0.178,88.036 ; 1.703,88.541 0.178,88.036 ; 25.352,87.988 0.178,88.036 ; 41.146,87.958 66.319,87.909 ; 64.794,87.404 66.319,87.909 ; 64.796,88.42 66.319,87.909 ; 66.319,87.655 66.32,88.163
  Top Layer w0.4: -21.336,64.719 -21.184,64.567 ; -21.336,67.259 -21.184,67.107 ; -18.212,54.407 -18.186,54.432 ; -18.212,56.947 -18.186,56.972 ; -18.212,59.487 -18.186,59.512 ; -18.212,62.027 -18.186,62.052 ; -18.212,64.567 -18.186,64.592 ; -18.212,67.107 -18.186,67.132 ; -18.212,69.647 -18.186,69.672 ; -18.212,72.187 -18.186,72.212 ; -18.212,74.727 -18.186,74.752 ; -11.176,51.892 -10.566,51.892 ; -10.566,69.672 -10.541,69.698 ; -7.518,51.892 -7.493,51.918 ; -7.518,54.432 -7.493,54.458 ; -7.518,56.972 -7.493,56.998 ; -7.518,59.512 -7.493,59.538 -7.315,59.36 ; -7.518,62.052 -7.493,62.078 ; -7.518,64.592 -7.493,64.618 ; -7.518,67.132 -7.493,67.158 ; -7.518,72.212 -7.493,72.238 ; -7.518,74.752 -7.493,74.778 ; -4.47,72.238 -3.886,72.238 -3.378,72.238
  Top Layer w1: -23.889,45.136 -24.892,45.136 v1(-26.645,46.888) -24.689,46.888 -22.784,48.793 v1(-20.041,48.793) ; -22.289,45.136 -20.625,45.136 -16.764,48.997 -9.478,48.997 ; -6.549,49.022 -4.42,49.022 -4.039,49.403
  Bottom Layer w0.4: -24.066,56.075 -24.066,56.112 ; -18.186,51.892 -18.034,51.74
  Bottom Layer w1: -28.702,79.527 -28.702,68.224 -25.197,64.719 ; -28.575,79.709 -27.868,80.416 ; -27.305,76.759 -27.305,69.393 -25.298,67.386 ; v1@-26.746,46.914 -26.746,57.951 -25.363,59.334 -25.363,62.241 -25.298,62.306 ; v1(-26.645,46.888) -24.486,44.729 -19.975,44.729 -15.606,49.098 -10.897,49.098 -7.341,45.542 -3.835,45.542 -1.778,47.6 -1.778,53.696 -3.124,55.042 ; -25.324,69.698 -25.324,74.549 -23.292,76.581 ; -24.841,64.719 -21.336,64.719 ; -24.841,67.259 -21.336,67.259 ; -24.812,80.493 -22.177,80.493 ; -24.384,77.419 -22.123,77.419 ; -24.359,48.693 -24.359,53.412 ; -24.066,56.112 -24.064,56.129 -23.749,59.135 -23.71,59.5 -21.184,62.027 ; -24.042,48.666 -24.042,47.511 -23.241,46.711 -19.761,46.711 -14.58,51.892 -11.176,51.892 ; -22.53,48.641 -21.184,49.987 -21.184,51.867 ; -20.828,54.407 -18.212,54.407 ; -20.828,56.947 -18.212,56.947 ; -20.828,59.487 -18.212,59.487 ; -20.828,62.027 -18.212,62.027 ; -20.828,64.567 -18.212,64.567 ; -20.828,67.107 -18.212,67.107 ; -20.828,69.647 -18.212,69.647 ; -20.828,72.187 -18.212,72.187 ; -20.828,74.727 -18.212,74.727 ; -20.803,51.892 -18.186,51.892 ; v1(-20.041,48.793) -18.364,50.47 -18.364,51.41 -18.034,51.74 ; -19.583,77.419 -19.583,80.67 ; -18.847,77.419 -17.475,77.419 ; -18.059,77.445 -16.586,77.445 -14.402,75.26 -14.402,55.118 -11.176,51.892 ; -14.402,75.717 -13.106,77.013 -3.505,77.013 -1.803,75.311 -1.803,73.812 -3.378,72.238 ; -10.566,54.432 -7.518,54.432 ; -10.566,56.972 -7.518,56.972 ; -10.566,59.512 -7.518,59.512 ; -10.566,62.052 -7.518,62.052 ; -10.566,64.592 -7.518,64.592 ; -10.566,67.132 -7.518,67.132 ; -10.566,72.212 -7.518,72.212 ; -10.566,74.752 -7.518,74.752 ; -10.541,69.698 -7.493,69.698 ; -7.518,51.892 -10.566,51.892 -11.176,51.892 ; -7.493,54.458 -6.553,54.458 -4.039,51.943 ; -7.493,56.998 -5.969,56.998 -5.385,57.582 -3.886,57.582 ; -7.493,74.778 -3.886,74.778 ; -7.315,59.36 -6.121,59.36 -5.359,60.122 -3.886,60.122 ; -4.47,72.238 -5.715,70.993 -5.715,64.491 -3.886,62.662 ; -3.886,55.042 -3.124,55.042 ; -3.886,69.698 -1.626,67.437 -1.626,56.058 ; -1.549,56.058 -2.565,55.042 -3.124,55.042

## Polygon pours and split planes (outlines as drawn)
no net on Bottom Layer "GND PLANE BOTTOM1" (solid, pour order 2): -29.87,41.885 -0.254,41.885 -0.203,41.935 -0.127,41.859 -0.127,0.127 -29.87,0.127 -29.896,0.102
no net on Bottom Layer "GND PLANE BOTTOM2" (solid, pour order 4): -29.896,82.931 -0.102,82.931 -0.102,42.113 -29.921,42.113
no net on Top Layer "GND PLANE TOP1" (solid, pour order 8): -30,42 0,42 0,0 -30,0
no net on Top Layer "GND PLANE TOP2" (solid, pour order 10): -30,83.058 -0.127,83.058 -0.152,83.033 -0.152,42.189 -29.87,42.189

## Keep-outs
Top Layer:
  lines w0.254: -30,-0.051 -30,83.058 0,83.058 ; -30,0 0,0 ; 0,0 66.04,0 66.04,83.058 0,83.058 ; 0,0 0,83.058 ; -30,42 0,42 -30,42

## Other copper
Top Layer:
  text "66.142 (mm)" at 25.604,87.073 h1.52 r359.89

## Silkscreen, mask and mechanical layers (free items; w line width, h text height)
Top Overlay:
  text "OFF ON" at 22.454,0.559 h1
  text "AIO - TG 1604 / Miguel Angel Bermeo / Fabian Andres Merchan / David Stiven Avila" at 30.429,0.457 h0.8

## Text inside footprints (layer, text, board x,y; h text height)
OdroidC2: Top Overlay "39" at 58.318,18.288 h1.27 r270; Top Overlay "40" at 60.858,18.288 h1.27 r270; Top Overlay "2" at 60.858,71.12 h1.27 r270; Top Overlay "1" at 58.318,71.12 h1.27 r270
Sensor_Array: Top Overlay "24" at 48.514,78.74 h1.27; Top Overlay "12" at 48.514,76.2 h1.27; Top Overlay "13" at 15.494,78.74 h1.27; Top Overlay "1" at 16.51,75.692 h1.27